# EAGLE board 8085_V1 (EAGLE 7.6.0)
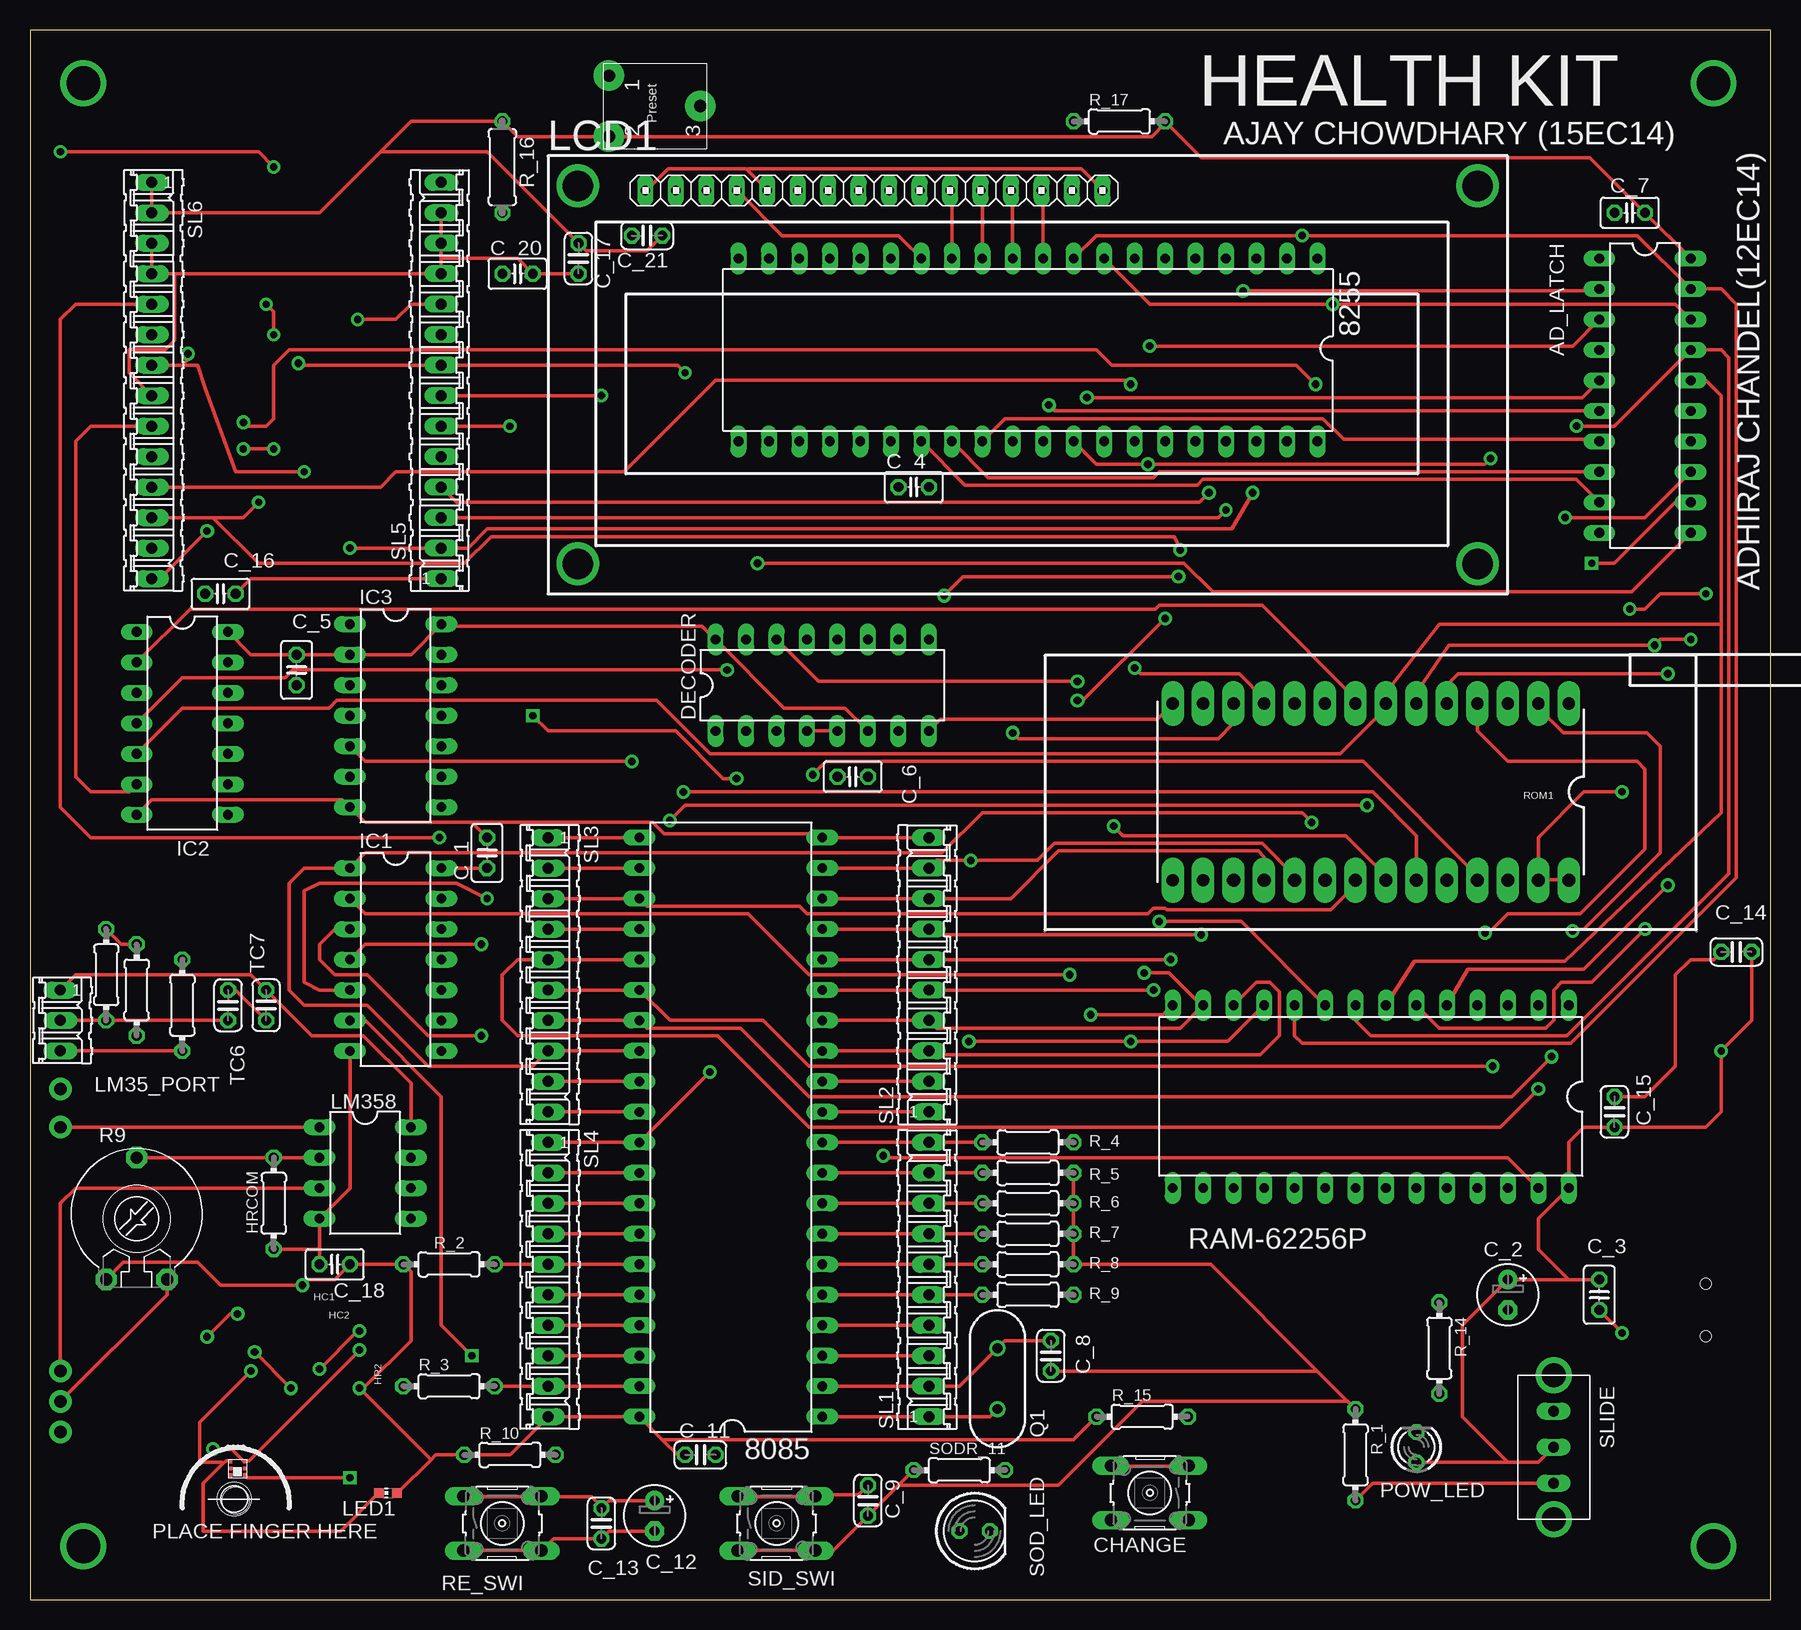
[diagram p0: board, top side]
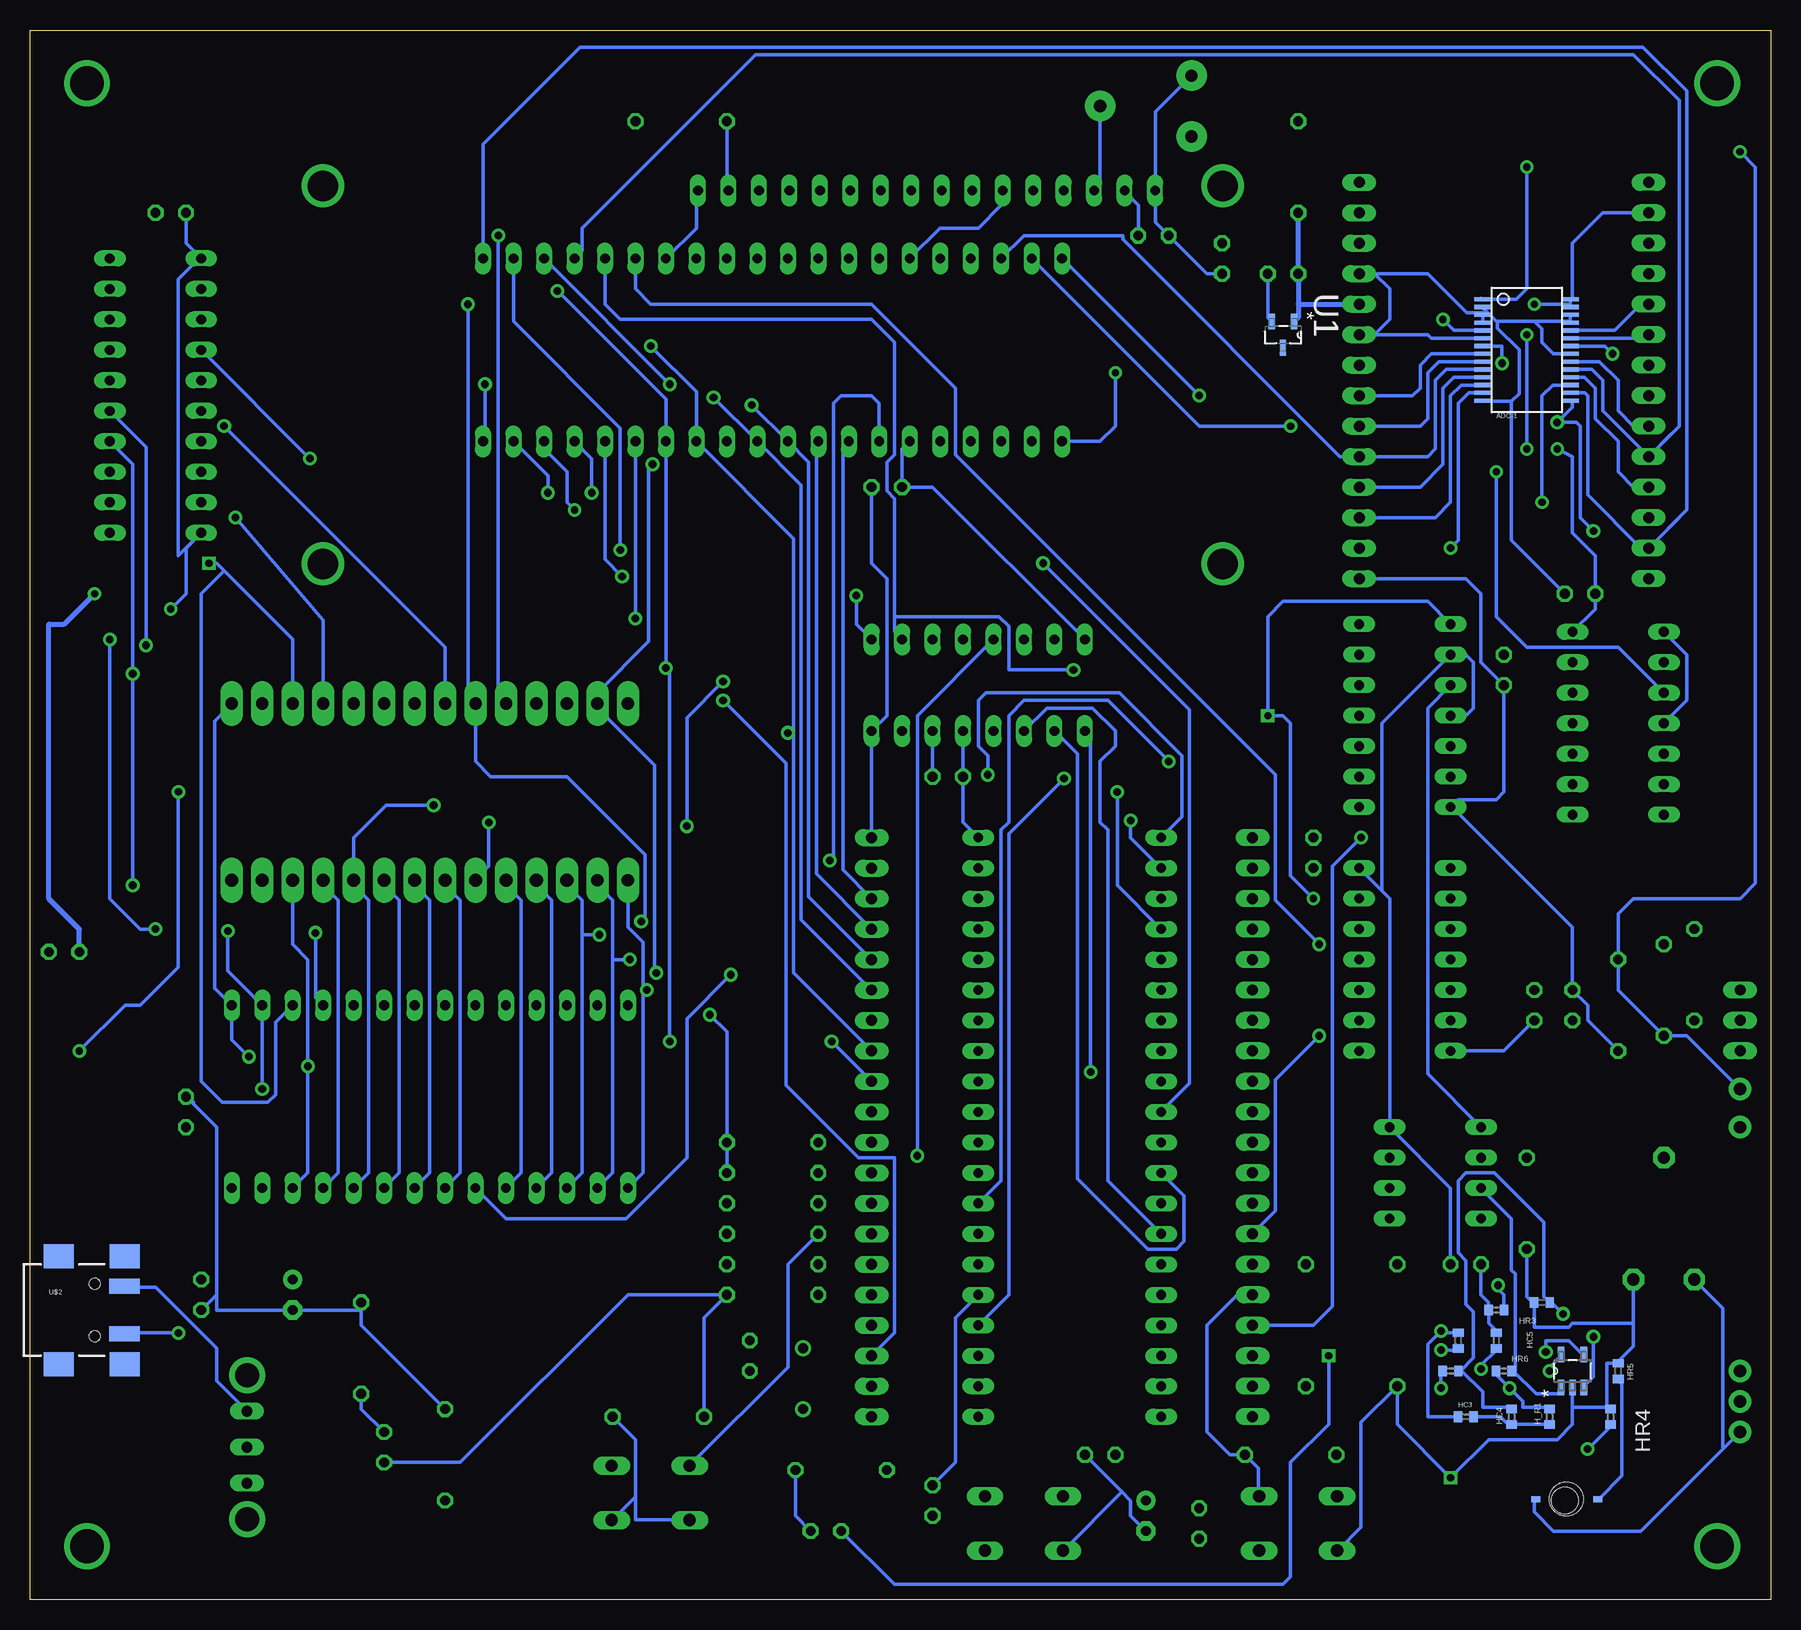
[diagram p1: board, bottom side, seen from below]

Size 145.09 x 130.8 mm. Coordinates in mm from the lower left corner, seen from the top.
Outline: 0,0 145.09,0 145.09,130.8 0,130.8 0,0
Copper layers (1*16): Top 0.035mm / dielectric 1.5mm / Bottom 0.035mm
Design rules "drcsetting *": minimum track width 12mil, minimum drill 25mil, track to track 12mil, track to pad 12mil, pad to pad 12mil, via to via 12mil, smd to smd 12mil, copper to edge 40mil, drill to drill 12mil, minimum pad ring 10mil, minimum via ring 10mil, stop-mask expansion 4mil, vias tented up to drill 0mil, thermal gap 10mil
Net classes: 0 default: width 0.305 mm, clearance 0.305 mm; 1 VCC: width 0.61 mm, clearance 0.305 mm to class 0, clearance 0.305 mm; 2 GND: width 0.61 mm, clearance 0.305 mm to class 0, clearance 0.305 mm to class 1, clearance 0.305 mm; 3 power: width 0.406 mm
Holes 2.2 mm at 17.14,8.26

## Footprints (pad centres in the part's own frame; a part is rotated, then mirrored left to right if it is on the bottom)
DIL40 = drill 0.813 long: 1 -24.13,-7.62; 2 -21.59,-7.62; 3 -19.05,-7.62; 4 -16.51,-7.62; 5 -13.97,-7.62; 6 -11.43,-7.62; 7 -8.89,-7.62; 8 -6.35,-7.62; 9 -3.81,-7.62; 10 -1.27,-7.62; 11 1.27,-7.62; 12 3.81,-7.62; 13 6.35,-7.62; 14 8.89,-7.62; 15 11.43,-7.62; 16 13.97,-7.62; 17 16.51,-7.62; 18 19.05,-7.62; 19 21.59,-7.62; 20 24.13,-7.62; 21 24.13,7.62; 22 21.59,7.62; 23 19.05,7.62; 24 16.51,7.62; 25 13.97,7.62; 26 11.43,7.62; 27 8.89,7.62; 28 6.35,7.62; 29 3.81,7.62; 30 1.27,7.62; 31 -1.27,7.62; 32 -3.81,7.62; 33 -6.35,7.62; 34 -8.89,7.62; 35 -11.43,7.62; 36 -13.97,7.62; 37 -16.51,7.62; 38 -19.05,7.62; 39 -21.59,7.62; 40 -24.13,7.62
DIL20 = drill 0.813 long: 1 -11.43,-3.81; 2 -8.89,-3.81; 3 -6.35,-3.81; 4 -3.81,-3.81; 5 -1.27,-3.81; 6 1.27,-3.81; 7 3.81,-3.81; 8 6.35,-3.81; 9 8.89,-3.81; 10 11.43,-3.81; 11 11.43,3.81; 12 8.89,3.81; 13 6.35,3.81; 14 3.81,3.81; 15 1.27,3.81; 16 -1.27,3.81; 17 -3.81,3.81; 18 -6.35,3.81; 19 -8.89,3.81; 20 -11.43,3.81
SSOP28 = smd 0.348 x 1.397: 1 -4.225,-3.656; 2 -3.575,-3.656; 3 -2.925,-3.656; 4 -2.275,-3.656; 5 -1.625,-3.656; 6 -0.975,-3.656; 7 -0.325,-3.656; 8 0.325,-3.656; 9 0.975,-3.656; 10 1.625,-3.656; 11 2.275,-3.656; 12 2.925,-3.656; 13 3.575,-3.656; 14 4.225,-3.656; 15 4.225,3.656; 16 3.575,3.656; 17 2.925,3.656; 18 2.275,3.656; 19 1.625,3.656; 20 0.975,3.656; 21 0.325,3.656; 22 -0.325,3.656; 23 -0.975,3.656; 24 -1.625,3.656; 25 -2.275,3.656; 26 -2.925,3.656; 27 -3.575,3.656; 28 -4.225,3.656
C025-025X050 = drill 0.813 octagon: 1 -1.27,0; 2 1.27,0
E2,5-5 = drill 0.813 pad 1.6: + -1.27,0 | drill 0.813 pad 1.6 octagon: - 1.27,0
C025-024X044 = drill 0.813 octagon: 1 -1.27,0; 2 1.27,0
B3F-10XX = drill 1.016 long: 1 -3.251,2.261; 2 3.251,2.261; 3 -3.251,-2.261; 4 3.251,-2.261
DIL16 = drill 0.813 long: 1 -8.89,-3.81; 2 -6.35,-3.81; 3 -3.81,-3.81; 4 -1.27,-3.81; 5 1.27,-3.81; 6 3.81,-3.81; 7 6.35,-3.81; 8 8.89,-3.81; 9 8.89,3.81; 10 6.35,3.81; 11 3.81,3.81; 12 1.27,3.81; 13 -1.27,3.81; 14 -3.81,3.81; 15 -6.35,3.81; 16 -8.89,3.81
KBREVMNTLED = smd 0.75 x 0.5 bottom: GND 5.144,0; V+ 0,0 | hole 2.794: 2.54,0
1X01NS = drill 1.016 pad 1.88: 1 0,0
R0402 = smd 0.7 x 0.9: 1 -0.65,0; 2 0.65,0
C0402 = smd 0.7 x 0.9: 1 -0.65,0; 2 0.65,0
0204/7 = drill 0.813 octagon: 1 -3.81,0; 2 3.81,0
DIL14 = drill 0.813 long: 1 -7.62,-3.81; 2 -5.08,-3.81; 3 -2.54,-3.81; 4 0,-3.81; 5 2.54,-3.81; 6 5.08,-3.81; 7 7.62,-3.81; 8 7.62,3.81; 9 5.08,3.81; 10 2.54,3.81; 11 0,3.81; 12 -2.54,3.81; 13 -5.08,3.81; 14 -7.62,3.81
16X2_LCD = drill 0.813 long: 1 8.12,33.608; 2 10.66,33.608; 3 13.2,33.608; 4 15.74,33.608; 5 18.28,33.608; 6 20.82,33.608; 7 23.36,33.608; 8 25.9,33.608; 9 28.44,33.608; 10 30.98,33.608; 11 33.52,33.608; 12 36.06,33.608; 13 38.6,33.608; 14 41.14,33.608; 15 43.68,33.608; 16 46.22,33.608 | drill 2.54: P$1 2.5,34; P$2 2.5,2.5; P$3 77.5,2.5; P$4 77.5,34
CHIP-LED0603 = smd 0.8 x 0.8: A 0,-0.75; C 0,0.75
03P = drill 0.914 long: 1 -2.54,0; 2 0,0; 3 2.54,0
DIL08 = drill 0.813 long: 1 -3.81,-3.81; 2 -1.27,-3.81; 3 1.27,-3.81; 4 3.81,-3.81; 5 3.81,3.81; 6 1.27,3.81; 7 -1.27,3.81; 8 -3.81,3.81
LED3MM = drill 0.813 octagon: A -1.27,0; K 1.27,0
HC49US = drill 0.813: 1 -2.54,0; 2 2.54,0
PT-10 = drill 1.016 pad 1.778 octagon: 1 -2.54,-5.08; 2 2.54,-5.08; 3 0,5.08
0207/7 = drill 0.813 octagon: 1 -3.81,0; 2 3.81,0
DIL28-6 = drill 0.813 long: 1 -16.51,-7.62; 2 -13.97,-7.62; 3 -11.43,-7.62; 4 -8.89,-7.62; 5 -6.35,-7.62; 6 -3.81,-7.62; 7 -1.27,-7.62; 8 1.27,-7.62; 9 3.81,-7.62; 10 6.35,-7.62; 11 8.89,-7.62; 12 11.43,-7.62; 13 13.97,-7.62; 14 16.51,-7.62; 15 16.51,7.62; 16 13.97,7.62; 17 11.43,7.62; 18 8.89,7.62; 19 6.35,7.62; 20 3.81,7.62; 21 1.27,7.62; 22 -1.27,7.62; 23 -3.81,7.62; 24 -6.35,7.62; 25 -8.89,7.62; 26 -11.43,7.62; 27 -13.97,7.62; 28 -16.51,7.62
DIL28-6-ZIF_SOCKET = drill 1.016 pad 1.88 long: 1 -24.13,-7.366; 2 -21.59,-7.366; 3 -19.05,-7.366; 4 -16.51,-7.366; 5 -13.97,-7.366; 6 -11.43,-7.366; 7 -8.89,-7.366; 8 -6.35,-7.366; 9 -3.81,-7.366; 10 -1.27,-7.366; 11 1.27,-7.366; 12 3.81,-7.366; 13 6.35,-7.366; 14 8.89,-7.366; 15 8.89,7.366; 16 6.35,7.366 | drill 1.1 pad 1.88 long: 17 3.81,7.366; 18 1.27,7.366; 19 -1.27,7.366; 20 -3.81,7.366; 21 -6.35,7.366; 22 -8.89,7.366; 23 -11.43,7.366; 24 -13.97,7.366; 25 -16.51,7.366; 26 -19.05,7.366; 27 -21.59,7.366; 28 -24.13,7.366
10P = drill 0.914 long: 1 -11.43,0; 2 -8.89,0; 3 -6.35,0; 4 -3.81,0; 5 -1.27,0; 6 1.27,0; 7 3.81,0; 8 6.35,0; 9 8.89,0; 10 11.43,0
14P = drill 0.914 long: 1 -16.51,0; 2 -13.97,0; 3 -11.43,0; 4 -8.89,0; 5 -6.35,0; 6 -3.81,0; 7 -1.27,0; 8 1.27,0; 9 3.81,0; 10 6.35,0; 11 8.89,0; 12 11.43,0; 13 13.97,0; 14 16.51,0
BIGSWITCH = drill 0.9 long: 1 -3,0; 2 0,0; 3 3,0 | drill 2 pad 2.184: TAB1 -6,0; TAB2 6,0
LED5MM = drill 0.813 octagon: A -1.27,0; K 1.27,0
SOT95P237X112-3N = smd 1.321 x 0.559: 1 -1.092,0.94; 2 -1.092,-0.94 | smd 1.321 x 0.508: 3 1.092,0
PRESET_LR = drill 1.016 pad 2.54: P$1 -2.54,-3.81; P$2 2.54,-3.81; P$3 0,3.81
USB(POWER) = smd 2.54 x 1.27: GND 2.5,-1.981; VBUS 2.5,1.981 | smd 2.5 x 2: GND@1 -3,-4.5; GND@2 -3,4.5; GND@3 2.5,4.5; GND@4 2.5,-4.5 | hole 0.9: 0,2.2; 0,-2.2
SOT95P270X145-5N = smd 1.321 x 0.559: 1 -1.372,0.94; 2 -1.372,0; 3 -1.372,-0.94; 4 1.372,-0.94; 5 1.372,0.94
APDS9008 = smd 0.35 x 0.35: GND 0.18,-1.42; NCC1 0.18,-0.18; OUT 1.36,-1.42; VCC 1.36,-0.18 | smd 0.3 x 0.35: NC 0.78,-1.42; NCC 0.78,-0.18

## Placement (x,y rotation side)
8085  [DIL40]  58.42,39.37 90 top
8255  [DIL40]  83.19,104.14 180 top
AD_LATCH  74HC573N  [DIL20]  134.62,100.33 270 top
ADC-1  ADS7842(12-ADC)  [SSOP28]  20.32,104.14 270 bottom
C_1  0.1uf  [C025-025X050]  38.1,62.23 90 top
C_2  10uf  [E2,5-5]  123.19,25.4 270 top
C_3  0.1uf  [C025-025X050]  130.81,25.4 270 top
C_4  0.1uf  [C025-025X050]  73.66,92.71 0 top
C_5  0.1uf  [C025-025X050]  22.23,77.47 270 top
C_6  0.1uf  [C025-025X050]  68.58,68.58 180 top
C_7  0.1uf  [C025-025X050]  133.35,115.57 180 top
C_8  22pf  [C025-024X044]  85.09,20.32 270 top
C_9  0.1uf  [C025-024X044]  69.85,8.26 270 top
C_11  [C025-024X044]  55.88,12.06 0 top
C_12  10uf  [E2,5-5]  52.07,6.99 270 top
C_13  0.1uf  [C025-024X044]  47.62,6.35 270 top
C_14  0.1uf  [C025-024X044]  142.24,53.98 180 top
C_15  0.1uf  [C025-024X044]  132.08,40.64 90 top
C_16  0.1uf  [C025-025X050]  15.88,83.82 0 top
C_17  [C025-024X044]  45.72,111.76 270 top
C_18  0.1uf  [C025-025X050]  25.4,27.94 180 top
C_20  [C025-025X050]  40.64,110.49 0 top
C_21  0.1uf  [C025-024X044]  51.44,113.67 180 top
CHANGE  [B3F-10XX]  93.34,8.89 180 top
DECODER  74HCT138N  [DIL16]  66.04,76.2 0 top
FINGERLED  KBREVMTNLED  [KBREVMNTLED]  19.56,8.38 180 top
GND  M01SMDNS  [1X01NS]  2.54,16.51 90 top
H_R1  10k  [R0402]  18.41,15.24 90 bottom
HC1  2.2uf  [C0402]  22.86,24.13 180 bottom
HC2  4.7uf  [C0402]  26.04,21.59 90 bottom
HC3  4.7uf  [C0402]  25.4,15.24 0 bottom
HC4  2.2uf  [C0402]  21.59,15.24 90 bottom
HC5  4.7uf  [C0402]  22.86,21.59 90 bottom
HEART_PULSE  M01SMDNS  [1X01NS]  2.54,19.05 90 top
HR2  100k  [R0402]  26.67,19.05 180 bottom
HR3  100k  [R0402]  19.05,24.77 0 bottom
HR4  12k  [R0402]  13.34,15.24 270 bottom
HR5  470  [R0402]  12.7,19.05 270 bottom
HR6  3.3m  [R0402]  22.23,19.05 0 bottom
HRCOM  [0204/7]  20.32,33.02 90 top
IC1  7404N  [DIL14]  30.48,53.34 270 top
IC2  7432N  [DIL14]  12.7,73.03 270 top
IC3  74HCT74N  [DIL14]  30.48,73.66 270 top
LCD1  [16X2_LCD]  43.18,83.82 0 top
LED1  [CHIP-LED0603]  29.84,8.89 90 top
LM35_PORT  [03P]  2.54,48.26 270 top
LM358  LM358N  [DIL08]  27.94,35.56 270 top
OUT1  M01SMDNS  [1X01NS]  2.54,13.97 90 top
POW_LED  LED3MM  [LED3MM]  115.57,12.7 90 top
PULSE  M01SMDNS  [1X01NS]  2.54,39.37 270 top
Q1  [HC49US]  80.64,18.41 270 top
R9  [PT-10]  8.89,31.75 0 top
R_1  1k  [0204/7]  110.49,12.06 270 top
R_2  10k  [0204/7]  34.92,27.94 0 top
R_3  10k  [0204/7]  34.92,17.78 0 top
R_4  10k  [0204/7]  83.19,38.1 180 top
R_5  10k  [0204/7]  83.19,35.56 180 top
R_6  10k  [0204/7]  83.19,33.02 180 top
R_7  10k  [0204/7]  83.19,30.48 180 top
R_8  10k  [0204/7]  83.19,27.94 180 top
R_9  10k  [0204/7]  83.19,25.4 180 top
R_10  10k  [0204/7]  40.01,12.06 0 top
R_14  [0204/7]  117.47,20.95 270 top
R_15  10k  [0204/7]  92.71,15.24 0 top
R_16  [0207/7]  39.37,119.38 270 top
R_17  1k  [0204/7]  90.81,123.19 0 top
R_18  10k  [0204/7]  12.7,49.53 270 top
R_19  68k  [0204/7]  8.89,50.8 270 top
R_20  22k  [0204/7]  6.35,52.07 90 top
RAM-62256P  [DIL28-6]  111.76,41.91 180 top
RE_SWI  [B3F-10XX]  39.37,6.35 0 top
ROM1  EEPROM_ZIF  [DIL28-6-ZIF_SOCKET]  104.14,67.31 180 top
SID_SWI  [B3F-10XX]  62.23,6.35 0 top
SL1  [10P]  74.93,26.67 90 top
SL2  [10P]  74.93,52.07 90 top
SL3  [10P]  43.18,52.07 270 top
SL4  [10P]  43.18,26.67 270 top
SL5  [14P]  34.29,101.6 90 top
SL6  [14P]  10.16,101.6 270 top
SLIDE  SLIDESWITCH-BIG  [BIGSWITCH]  127,12.7 270 top
SOD_LED  LED5MM  [LED5MM]  78.74,5.71 0 top
SODR_11  330  [0204/7]  77.47,10.79 0 top
TC6  100nF  [C025-024X044]  16.51,49.53 270 top
TC7  100nF  [C025-024X044]  19.68,49.53 90 top
TEMP_SENSOR  M01SMDNS  [1X01NS]  2.54,42.55 0 top
U1  LM4040A41IDBZT  [SOT95P237X112-3N]  40.64,105.41 270 bottom
U$1  PRESET_LR  [PRESET_LR]  52.07,124.46 270 top
U$2  USB(POWER)  [USB(POWER)]  139.7,24.13 0 bottom
U$3  MCP6001UT-E/OT  [SOT95P270X145-5N]  16.51,19.05 90 bottom
U$4  APDS9008  [APDS9008]  16.51,10.16 90 top

## Library data of the parts
8085 8255 = micro-intel; OC_FARNELL: unknown; OC_NEWARK: unknown
AD_LATCH DECODER IC1-IC3 = 74xx-eu
ADC-1 = ADS7842(12Bit_ADC)
C_1 C_2 C_12 = MSP PROJECT LIBRARY
C_3-C_7 C_16 C_18 H_R1 HC1-HC5 HR2-HR6 = resistor
C_8 C_9 C_11 C_13-C_15 C_17 C_20 C_21 HRCOM R9 R_1-R_10 R_14 R_15 R_17-R_20 SODR_11 TC6 TC7 = rcl
CHANGE RE_SWI SID_SWI = switch-omron; MPN: B3F-1000; OC_FARNELL: 176432; OC_NEWARK: 36M3542
FINGERLED U$4 = untitled
GND HEART_PULSE OUT1 PULSE TEMP_SENSOR = SparkFun
LCD1 LM358 Q1 SOD_LED U$1 U$2 = CEDT_JANUARY_2015_v5
LED1 = led
LM35_PORT SL1-SL6 = con-amp-quick; OC_FARNELL: unknown; OC_NEWARK: unknown
POW_LED = CEDTv81
R_16 = CEDT_JANUARY_2015_v6 (2)
RAM-62256P = memory-hitachi; OC_FARNELL: unknown; OC_NEWARK: unknown
ROM1 = eepromzif
SLIDE = CEDT_JANUARY_2015_v5_a
U1 = Texas Instruments_By_element14_Batch_1; MPN: LM4040A41IDBZT; OC_FARNELL: 1755107; OC_NEWARK: 66K2443; PACKAGE: 3-SOT-23; SUPPLIER: TEXAS INSTRUMENTS
U$3 = untitled; MPN: MCP6001UT-E/OT; OC_FARNELL: 1840893; OC_NEWARK: 84R5183; PACKAGE: SOT23-5; SUPPLIER: Microchip

## Nets
A0: 8255.9 AD_LATCH.19 RAM-62256P.10 ROM1.10
A1: 8255.8 AD_LATCH.18 RAM-62256P.9 ROM1.9
A2: AD_LATCH.17 IC2.2 RAM-62256P.8 ROM1.8
A3: AD_LATCH.16 IC2.5 RAM-62256P.7 ROM1.7
A4: AD_LATCH.15 RAM-62256P.6 ROM1.6
A5: AD_LATCH.14 RAM-62256P.5 ROM1.5
A6: AD_LATCH.13 RAM-62256P.4 ROM1.4
A7: AD_LATCH.12 RAM-62256P.3 ROM1.3
A8: 8085.21 RAM-62256P.25 ROM1.25 SL3.1
A9: 8085.22 RAM-62256P.24 ROM1.24 SL3.2
A10: 8085.23 RAM-62256P.21 ROM1.21 SL3.3
A11: 8085.24 RAM-62256P.23 ROM1.23 SL3.4
A12: 8085.25 RAM-62256P.2 ROM1.2 SL3.5
A13: 8085.26 RAM-62256P.26 ROM1.26 SL3.6
A14: 8085.27 RAM-62256P.1 ROM1.1 SL3.7
A15: 8085.28 IC1.1 ROM1.20 SL3.8
A15*: IC1.2 RAM-62256P.20
AD0: 8085.12 8255.34 AD_LATCH.2 RAM-62256P.11 ROM1.11 SL2.2
AD1: 8085.13 8255.33 AD_LATCH.3 RAM-62256P.12 ROM1.12 SL2.3
AD2: 8085.14 8255.32 AD_LATCH.4 RAM-62256P.13 ROM1.13 SL2.4
AD3: 8085.15 8255.31 AD_LATCH.5 RAM-62256P.15 ROM1.15 SL2.5
AD4: 8085.16 8255.30 AD_LATCH.6 RAM-62256P.16 ROM1.16 SL2.6
AD5: 8085.17 8255.29 AD_LATCH.7 RAM-62256P.17 ROM1.17 SL2.7
AD6: 8085.18 8255.28 AD_LATCH.8 RAM-62256P.18 ROM1.18 SL2.8
AD7: 8085.19 8255.27 AD_LATCH.9 RAM-62256P.19 ROM1.19 SL2.9
ADC0: 8255.4 ADC-1.19 SL6.10
ADC1: 8255.3 ADC-1.18 SL6.11
ADC2: 8255.2 ADC-1.17 SL6.12
ADC3: 8255.1 ADC-1.16 SL6.13
ADC4: 8255.40 ADC-1.15 SL6.14
ADC5: 8255.39 ADC-1.13 SL5.2
ADC6: 8255.38 ADC-1.12 SL5.3
ADC7: 8255.37 ADC-1.11 SL5.4
ADC8: 8255.18 ADC-1.10 SL5.5
ADC9: 8255.19 ADC-1.9 SL5.6
ADC10: 8255.20 ADC-1.8 SL5.7
ADC11: 8255.21 ADC-1.7 SL5.8
ADC_RD*: ADC-1.20 IC2.6 SL6.9
ADC_WR*: ADC-1.22 IC2.3 SL6.7
AIN0: SL5.14
ALE: 8085.30 AD_LATCH.11 SL3.10
BUSY*: ADC-1.23 SL6.6
CLK_OUT: 8085.37 ADC-1.24 SL4.7 SL6.5
CS: 8255.6 IC1.4
D4: 8255.13 LCD1.11
D5: 8255.12 LCD1.12
D6: 8255.11 LCD1.13
D7: 8255.10 LCD1.14
EN: 8255.15 LCD1.6
GND: 8085.20 8255.7 AD_LATCH.1 AD_LATCH.10 ADC-1.2 ADC-1.3 ADC-1.4 ADC-1.6 ADC-1.14 ADC-1.21 ADC-1.25 ADC-1.26 C_1.2 C_2.- C_3.2 C_4.2 C_5.2 C_6.2 C_7.2 C_8.2 C_9.2 C_11.2 C_12.- C_13.2 C_14.2 C_15.2 C_16.2 C_17.2 C_18.2 C_20.2 C_21.2 DECODER.4 DECODER.5 DECODER.8 GND.1 HC1.2 HC5.2 HR3.1 HR4.1 HR5.1 HRCOM.1 IC1.7 IC2.7 IC3.7 LCD1.1 LCD1.5 LCD1.16 LM35_PORT.3 LM358.4 R9.2 R_1.1 R_3.1 R_4.1 R_5.1 R_6.1 R_7.1 R_8.1 R_14.1 R_18.2 RAM-62256P.14 RE_SWI.3 RE_SWI.4 ROM1.14 SID_SWI.3 SID_SWI.4 SL2.10 SL5.1 SL5.9 SL5.11 SL5.12 SL5.13 SL6.3 SL6.4 SL6.8 SODR_11.1 TC6.1 TC7.1 U1.2 U$1.P$1 U$2.GND U$3.2 U$4.GND
HLDA: 8085.38 SL4.8
HOLD: 8085.39 R_3.2 SL4.9
INTA: 8085.11 SL2.1
INTR: 8085.10 R_4.2 SL1.10
IO/M*: 8085.34 DECODER.3 IC1.3 SL4.4
IOR*: 8255.5 DECODER.10 IC2.1 IC2.4
IOW*: 8255.36 DECODER.9
MEMR*: DECODER.14 RAM-62256P.22 ROM1.22
MEMW*: DECODER.13 RAM-62256P.27
N$1: SOD_LED.K SODR_11.2
N$2: POW_LED.K R_14.2
N$3: IC1.6 SOD_LED.A
N$4: LED1.C U$3.5 U$4.VCC
N$5: HC2.2 HC3.1 HC5.1
N$6: 8255.16
N$7: 8255.17
N$8: H_R1.1 HC3.2 HC4.1
N$9: HC4.2 HR2.1 HR3.2 U$3.3
N$10: H_R1.2 HR6.1 U$3.4
N$11: HC2.1 HR4.2 U$4.OUT
N$12: FINGERLED.GND HR5.2
N$13: ADC-1.1 R_18.1 R_19.2 TEMP_SENSOR.1
N$14: LM35_PORT.2 R_20.1 TC6.2
N$16: LCD1.3 U$1.P$3
N$17: R_19.1 R_20.2
N$19: HRCOM.2 LM358.2 R9.3
N$20: IC3.3 LM358.1 PULSE.1
N$29: LCD1.15 R_17.1
N$31: SLIDE.1 U$2.VBUS
N$32: R_1.2 SLIDE.3
OUT: HEART_PULSE.1 HR6.2 LM358.3 U$3.1
RD*: 8085.32 DECODER.2 SL4.2
READY: 8085.35 R_2.2 SL4.5
RES_IN: 8085.36 C_12.+ C_13.1 R_10.2 RE_SWI.1 RE_SWI.2 SL4.6
RES_OUT: 8085.3 8255.35 SL1.3
RS: 8255.14 LCD1.4
RST5_5: 8085.9 R_5.2 SL1.9
RST6.5: 8085.8 IC3.5 R_6.2 SL1.8
RST7.5: 8085.7 CHANGE.3 CHANGE.4 R_7.2 SL1.7
S0: 8085.29 SL3.9
S1: 8085.33 SL4.3
SID: 8085.5 C_9.1 R_9.2 SID_SWI.1 SID_SWI.2 SL1.5
SID1: CHANGE.1 CHANGE.2 R_15.2
SOD: 8085.4 IC1.5 IC3.1 SL1.4
TRAP: 8085.6 R_8.2 SL1.6
VCC: 8085.40 8255.26 AD_LATCH.20 ADC-1.27 ADC-1.28 C_1.1 C_2.+ C_3.1 C_4.1 C_5.1 C_6.1 C_7.1 C_11.1 C_14.1 C_15.1 C_16.1 C_17.1 C_18.1 C_21.1 DECODER.6 DECODER.16 FINGERLED.V+ HC1.1 HR2.2 IC1.14 IC2.14 IC3.2 IC3.4 IC3.14 LCD1.2 LED1.A LM35_PORT.1 LM358.8 OUT1.1 POW_LED.A R9.1 R_2.1 R_9.1 R_10.1 R_15.1 R_16.1 R_17.2 RAM-62256P.28 ROM1.27 ROM1.28 SL4.10 SL6.1 SL6.2 SLIDE.2 TC7.2 U$1.P$2
VREF [power]: ADC-1.5 C_20.1 R_16.2 SL5.10 U1.1
WR*: 8085.31 DECODER.1 SL4.1
X1: 8085.1 Q1.2 SL1.1
X2: 8085.2 C_8.1 Q1.1 SL1.2

## Tracks (layer width: path | path; a pad name or v marks a point on that pad's centre or on a via)
A0  (via drill 0.64)
  Top 0.305: 8255.9 88.9,113.67 v106.05,113.67 133.99,113.67 AD_LATCH.19 140.97,109.22 142.24,107.95 142.24,60.17 128.43,46.35 106.05,46.35 105.41,46.99 RAM-62256P.10
  Bottom 0.305: v106.05,113.67 106.05,75.41 105.41,74.77 ROM1.10
A1  (via drill 0.64)
  Top 0.305: RAM-62256P.9 100.97,56.52 v94.14,56.52 | 8255.8 93.34,107.95 v108.58,107.95 137.16,107.95 AD_LATCH.18
  Bottom 0.305: v94.14,56.52 93.82,56.83 93.82,62.07 100.33,68.58 106.68,68.58 107.95,69.85 ROM1.9 107.95,74.77 108.58,75.41 v108.58,107.95
A2  (via drill 0.64)
  Top 0.305: IC2.2 13.34,82.55 93.82,82.55 94.14,82.87 102.71,82.87 110.49,75.09 ROM1.8 | v128.91,97.79 132.08,97.79 AD_LATCH.17 140.97,104.14 141.6,103.5 141.6,60.48 128.11,46.99 111.76,46.99 110.49,48.26 RAM-62256P.8
  Bottom 0.305: v128.91,97.79 110.49,79.38 ROM1.8
A3
  Top 0.305: RAM-62256P.7 115.41,53.18 127.95,53.18 140.97,65.56 140.97,81.28 | IC2.5 12.7,74.3 24.92,74.3 25.56,74.93 52.23,74.93 56.67,70.48 109.22,70.48 113.03,74.3 ROM1.7 113.03,75.56 117.47,81.28 140.97,81.28 | AD_LATCH.16 139.7,101.6 140.97,100.33 140.97,81.28
A4  (via drill 0.6, 0.64)
  Top 0.305: ROM1.6 115.57,75.56 118.27,79.53 v135.41,79.53 135.89,80.01 v138.43,80.01 | RAM-62256P.6 117.47,47.62 126.36,47.62 127,48.26 127,50.8 127.64,51.44 130.18,51.44 v134.62,55.88
  Bottom 0.305: AD_LATCH.15 135.41,96.04 v135.41,79.53 | v134.62,55.88 135.89,55.88 138.43,58.42 v138.43,80.01
A5  (via drill 0.64)
  Top 0.305: RAM-62256P.5 119.86,52.55 129.54,52.55 v136.53,59.53 | v136.53,77.15 119.06,77.15 118.11,76.2 ROM1.5
  Bottom 0.305: v136.53,59.53 v136.53,77.15 136.53,94.61 AD_LATCH.14
A6  (via drill 0.64)
  Top 0.305: 120.65,74.3 ROM1.4 120.65,72.39 123.19,69.85 133.99,69.85 134.62,69.22 134.62,62.55 129.22,57.15 123.19,57.15 121.6,55.56 v121.28,55.56 | AD_LATCH.13 134.62,90.17 v127.95,90.17
  Bottom 0.305: RAM-62256P.4 121.28,50.16 v121.28,55.56 | v127.95,90.17 120.65,81.6 ROM1.4
A7  (via drill 0.6)
  Top 0.305: AD_LATCH.12 137.16,91.44 132.08,86.36 v130.18,86.36
  Bottom 0.305: RAM-62256P.3 124.62,48.1 124.62,42.07 125.25,41.43 129.06,41.43 130.81,43.18 130.81,83.82 128.91,85.72 | 128.91,85.72 129.54,86.36 v130.18,86.36 130.33,86.2 | 128.91,85.72 123.19,80.01 ROM1.3
A8  (via drill 0.64)
  Top 0.305: SL3.1 8085.21 | ROM1.25 120.65,60.33 111.12,69.85 66.36,69.85 v65.25,68.74
  Bottom 0.305: RAM-62256P.25 119.38,35.56 119.38,58.26 120.65,59.53 ROM1.25 | 8085.21 49.05,65.25 49.05,70.33 54.29,75.56 65.41,75.56 66.04,74.93 66.04,71.12 65.25,70.33 v65.25,68.74
A9  (via drill 0.64)
  Top 0.305: SL3.2 8085.22 | v53.34,64.93 54.61,66.2 v111.44,66.2
  Bottom 0.305: RAM-62256P.24 116.84,35.56 116.84,58.26 118.11,59.53 ROM1.24 118.11,63.5 115.41,66.2 v111.44,66.2 | 8085.22 53.34,63.5 v53.34,64.93
A10
  Top 0.305: SL3.3 8085.23 51.44,57.78 64.14,57.78 64.77,57.15 93.19,57.15 93.66,57.63 94.61,57.63 94.77,57.47 108.43,57.47 110.49,59.53 ROM1.21
  Bottom 0.305: RAM-62256P.21 109.22,35.56 109.22,58.26 110.49,59.53 ROM1.21
A11  (via drill 0.64)
  Top 0.305: SL3.4 8085.24 | v54.45,67.31 111.92,67.31 115.57,63.66 ROM1.23
  Bottom 0.305: RAM-62256P.23 114.3,35.56 114.3,58.26 115.57,59.53 ROM1.23 | 8085.24 54.45,59.53 v54.45,67.31
A12  (via drill 0.64)
  Top 0.305: 8085.25 SL3.5 40.64,53.34 39.37,52.07 39.37,48.26 40.64,46.99 57.31,46.99 64.93,39.37 122.56,39.37 v125.73,42.55 | ROM1.2 125.73,74.3 127.79,72.23 134.78,72.23 135.89,71.12 135.89,62.23 129.54,55.88 128.75,55.88 v128.59,55.72
  Bottom 0.305: v128.59,55.72 128.59,52.39 RAM-62256P.2 v125.73,42.55
A13  (via drill 0.64)
  Top 0.305: SL3.6 8085.26 53.34,48.26 61.12,48.26 64.93,44.45 v121.92,44.45
  Bottom 0.305: RAM-62256P.26 121.92,35.56 v121.92,44.45 121.92,53.34 123.19,54.61 ROM1.26
A14  (via drill 0.64)
  Top 0.305: SL3.7 8085.27 51.44,47.62 59.21,47.62 64.93,41.91 123.51,41.91 v126.84,45.24
  Bottom 0.305: ROM1.1 128.27,74.61 129.7,73.18 129.7,50.96 RAM-62256P.1 128.27,46.67 v126.84,45.24
A15  (via drill 0.64)
  Top 0.305: 8085.28 SL3.8 41.91,44.45 33.18,44.45 28.1,49.53 22.86,49.53 21.59,50.8 21.59,59.69 22.86,60.96 IC1.1 27.94,62.23 76.04,62.23 79.38,65.56 106.05,65.56 v106.84,64.77
  Bottom 0.305: v106.84,64.77 106.84,61.12 107.95,60.01 ROM1.20
A15*  (via drill 0.64)
  Top 0.305: IC1.2 27.94,57.15 59.85,57.15 64.93,52.07 v86.68,52.07
  Bottom 0.305: v86.68,52.07 90.33,48.42 90.33,36.83 95.41,31.75 105.41,31.75 RAM-62256P.20
AD0  (via drill 0.64)
  Top 0.305: SL2.2 8085.12 | RAM-62256P.11 99.85,46.51 v91.76,46.51 v78.26,46.51 | v92.08,77.63 92.55,77.15 100.81,77.15 102.87,75.09 ROM1.11 | AD_LATCH.2 130.65,109.06 v101.12,109.06
  Bottom 0.305: SL2.2 v78.26,46.51 | v101.12,109.06 92.08,100.01 8255.34 v92.08,77.63 91.76,77.31 v91.76,46.51
AD1  (via drill 0.64)
  Top 0.305: 8085.13 SL2.3 75.25,45.4 102.55,45.4 104.14,46.99 104.14,50.64 103.35,51.44 102.23,51.44 RAM-62256P.12 | AD_LATCH.3 128.59,104.46 v93.34,104.46 | ROM1.12 100.33,73.03 99.06,71.75 82.39,71.75 v81.92,72.23
  Bottom 0.305: 81.44,72.23 81.44,52.23 SL2.3 | 81.44,72.23 81.44,88.42 8255.33 89.53,100.65 v93.34,104.46 | 81.44,72.23 v81.92,72.23
AD2  (via drill 0.64)
  Top 0.305: 8085.14 SL2.4 75.56,47.62 95.89,47.62 RAM-62256P.13 97.63,49.53 94.93,52.23 v92.87,52.23 | 8255.32 88.9,94.61 v93.19,94.61 121.28,94.61 v121.76,95.09
  Bottom 0.305: v93.19,94.61 93.5,94.3 93.5,79.85 97.79,75.56 ROM1.13 97.79,74.3 93.03,69.53 93.03,52.39 v92.87,52.23 | v121.76,95.09 AD_LATCH.4
AD3  (via drill 0.64)
  Top 0.305: 8085.15 SL2.5 v93.66,50.8 | AD_LATCH.5 129.38,100.17 v88.11,100.17
  Bottom 0.305: RAM-62256P.15 93.98,35.56 93.98,50.8 | 93.98,50.8 93.98,54.77 95.25,56.04 ROM1.15 | SL2.5 80.8,56.67 80.8,92.87 8255.31 v88.11,100.17 | v93.66,50.8 93.98,50.8
AD4  (via drill 0.64)
  Top 0.305: 8085.16 SL2.6 v95.09,53.34 | AD_LATCH.6 85.41,99.06 v84.93,99.54
  Bottom 0.305: RAM-62256P.16 96.52,35.56 96.52,53.34 | 96.52,53.34 96.52,58.26 97.79,59.53 ROM1.16 | SL2.6 80.17,58.58 80.17,94.77 8255.30 v84.93,99.54 | v95.09,53.34 96.52,53.34
AD5  (via drill 0.64)
  Top 0.305: 8085.17 SL2.7 75.41,55.4 v97.63,55.4 | AD_LATCH.7 130.65,96.68 109.54,96.68 107.79,98.42 81.28,98.42 8255.29
  Bottom 0.305: RAM-62256P.17 99.06,35.56 99.06,55.4 | 99.06,55.4 99.06,58.26 100.33,59.53 ROM1.17 | 8255.29 79.53,96.36 79.53,60.48 SL2.7 | v97.63,55.4 99.06,55.4
AD6
  Top 0.305: 8085.18 SL2.8 81.76,58.42 85.72,62.39 102.39,62.39 102.87,61.91 ROM1.18 | AD_LATCH.8 94.14,93.98 93.66,93.5 79.85,93.5 8255.28
  Bottom 0.305: RAM-62256P.18 101.6,35.56 101.6,58.26 102.87,59.53 ROM1.18 | 8255.28 77.31,96.04 77.31,60.8 SL2.8
AD7  (via drill 0.64)
  Top 0.305: 8255.27 77.95,92.87 97.31,92.87 97.79,93.34 128.91,93.34 AD_LATCH.9 | 8085.19 SL2.9 75.56,61.59 v78.42,61.59 83.98,61.59 85.41,63.02 102.71,63.02 105.41,60.33 ROM1.19
  Bottom 0.305: RAM-62256P.19 104.14,35.56 104.14,58.26 105.41,59.53 ROM1.19 | 8255.27 74.3,99.69 74.93,100.33 77.47,100.33 78.11,99.69 78.11,61.91 v78.42,61.59
ADC0
  Bottom 0.305: SL6.10 8.26,97.16 | ADC-1.19 14.88,102.52 13.97,101.6 13.97,99.06 SL6.10 | 8255.4 99.06,112.39 99.06,114.3 84.61,128.75 11.43,128.75 7.62,124.94 7.62,97.79 SL6.10
ADC1  (via drill 0.64)
  Top 0.305: SL6.11 29.21,92.71 30.48,93.98 49.53,93.98 57.15,101.6 91.44,101.6 v91.76,101.28
  Bottom 0.305: v91.76,101.28 8255.3 | ADC-1.18 15.51,101.86 14.61,100.97 14.61,98.42 12.7,96.52 12.7,93.98 11.43,92.71 SL6.11
ADC2  (via drill 0.6, 0.64)
  Top 0.305: 95.73,87.95 v95.89,87.47 95.41,88.58 38.42,88.58 36.2,86.36 19.05,86.36 15.24,90.17 | SL6.12 15.24,90.17 | 15.24,90.17 17.78,90.17 v19.05,91.44
  Bottom 0.305: v95.89,87.47 95.89,97.63 104.78,106.52 8255.2 | ADC-1.17 18.16,101.22 19.05,100.33 v19.05,91.44
ADC3
  Bottom 0.305: 107.16,111.92 8255.1 107.31,121.28 99.22,129.38 10.64,129.38 6.99,125.73 6.99,90.81 SL6.13 | 7.62,90.17 SL6.13 | ADC-1.16 15.47,100.56 15.24,100.33 15.24,92.08 10.79,87.63 SL6.13
ADC4  (via drill 0.64)
  Top 0.305: v14.76,89.06 10.79,85.09 SL6.14 | v107.16,101.28 105.57,102.87 90.17,102.87 88.9,104.14 21.59,104.14 20.32,102.87 20.32,98.42 19.68,97.79 18.1,97.79 v17.78,98.11
  Bottom 0.305: ADC-1.15 16.51,99.85 16.51,99.38 v17.78,98.11 16.19,98.11 15.88,97.79 15.88,90.17 v14.76,89.06 | 8255.40 107.16,96.68 v107.16,101.28
ADC5  (via drill 0.6, 0.64)
  Top 0.305: v101.92,92.23 100.17,89.22 38.1,89.22 36.51,87.63 SL5.2 v26.67,87.63
  Bottom 0.305: 8255.39 101.92,93.66 v101.92,92.23 | ADC-1.13 25.16,100.56 26.04,99.69 26.04,88.27 v26.67,87.63
ADC6  (via drill 0.6)
  Top 0.305: v99.69,90.81 99.06,90.17 SL5.3
  Bottom 0.305: ADC-1.12 25.79,101.22 26.67,100.33 26.67,91.44 27.94,90.17 SL5.3 | 8255.38 102.23,95.89 100.33,93.98 100.33,91.44 v99.69,90.81
ADC7  (via drill 0.64)
  Top 0.305: v98.27,92.23 97.47,91.44 35.56,91.44 SL5.4
  Bottom 0.305: 8255.37 98.27,95.09 v98.27,92.23 | ADC-1.11 26.41,101.86 27.3,100.97 27.3,94.61 29.21,92.71 SL5.4
ADC8
  Bottom 0.305: 8255.18 62.23,113.67 53.98,113.67 53.98,113.35 35.88,95.25 SL5.5 28.57,95.25 27.94,95.89 27.94,101.6 27.02,102.52 ADC-1.10
ADC9  (via drill 0.6)
  Top 0.305: v40.01,97.79 SL5.6
  Bottom 0.305: 8255.19 47.62,97.79 v40.01,97.79 | ADC-1.9 27.64,103.17 28.57,102.23 28.57,98.42 29.21,97.79 SL5.6
ADC10  (via drill 0.64)
  Top 0.305: SL5.7 v47.62,100.33
  Bottom 0.305: v47.62,100.33 8255.20 | ADC-1.8 28.27,103.81 29.21,102.87 29.21,100.97 29.84,100.33 SL5.7
ADC11  (via drill 0.6, 0.64)
  Top 0.305: v22.38,103.03 22.54,102.87 SL5.8 53.98,102.87 v54.61,102.23
  Bottom 0.305: v22.38,103.03 22.38,104.46 23.97,104.46 ADC-1.7 | 8255.21 55.88,96.52 54.61,97.79 v54.61,102.23
ADC_RD*
  Top 0.305: SL6.9 5.08,97.79 3.81,96.52 3.81,68.58 5.08,67.31 8.26,67.31 IC2.6
  Bottom 0.305: ADC-1.20 14.27,103.17 12.7,101.6 12.7,99.06 11.43,97.79 SL6.9
ADC_WR*  (via drill 0.6, 0.64)
  Top 0.305: SL6.7 12.7,102.87 | 12.7,102.87 13.97,102.87 14.61,100.97 17.14,93.98 v22.86,93.98 | v13.18,103.82 13.18,103.35 12.7,102.87
  Bottom 0.305: ADC-1.22 16.67,104.46 13.81,104.46 v13.18,103.82 | IC2.3 12.7,79.38 20.32,79.38 22.86,81.92 v22.86,93.98
ALE  (via drill 0.64)
  Top 0.305: SL3.10 8085.30 | AD_LATCH.11 133.51,83.98 98.58,83.98 96.2,86.36 v60.64,86.36
  Bottom 0.305: v60.64,86.36 48.42,74.14 48.42,43.02 8085.30
BUSY*
  Bottom 0.305: ADC-1.23 10.46,105.11 SL6.6
CLK_OUT  (via drill 0.64)
  Top 0.305: SL4.7 8085.37 | v34.13,63.5 5.08,63.5 2.54,66.04 2.54,106.68 3.81,107.95 SL6.5
  Bottom 0.305: v34.13,63.5 36.51,61.12 36.51,24.45 38.1,22.86 SL4.7 | ADC-1.24 12.98,105.77 10.79,107.95 SL6.5
CS  (via drill 0.64)
  Top 0.305: IC1.4 27.94,54.61 v37.62,54.61
  Bottom 0.305: v37.62,54.61 41.27,58.26 41.27,68.74 67.94,95.41 67.94,100.97 74.93,107.95 93.34,107.95 94.61,109.22 8255.6
D4
  Top 0.305: 8255.13 76.83,117.32 LCD1.11
D5
  Top 0.305: 8255.12 79.38,117.32 LCD1.12
D6
  Top 0.305: 8255.11 81.92,117.32 LCD1.13
D7
  Top 0.305: 8255.10 84.45,117.32 LCD1.14
EN
  Bottom 0.305: LCD1.6 64.14,117.32 64.14,116.2 66.04,114.3 69.22,114.3 8255.15
GND  (via drill 0.6, 0.64)
  Top 0.305: R_5.1 R_6.1 R_7.1 R_8.1 98.42,27.94 107.31,19.05 | RAM-62256P.14 94.46,48.74 v88.42,48.74 | C_3.2 v132.72,22.23 | C_16.2 18.41,85.09 SL5.1 | SL6.8 8.26,102.23 8.26,104.14 11.27,104.14 12.06,104.93 12.06,110.49 | 12.06,110.49 SL6.4 SL6.3 | SL5.13 SL5.12 34.29,111.76 | 34.29,111.76 SL5.11 12.06,110.49 | C_17.2 C_20.2 40.64,111.76 34.29,111.76 | 59.77,119.14 59.69,119.22 53.18,119.22 51.44,117.47 LCD1.1 | 59.77,119.14 61.44,117.47 LCD1.5 | LCD1.16 89.38,117.47 87.63,119.22 59.85,119.22 59.77,119.14 | DECODER.5 DECODER.4 | DECODER.8 75.88,73.34 93.98,73.34 95.25,74.61 ROM1.14 | SL2.10 8085.20 65.72,63.82 52.86,63.82 51.91,64.77 36.99,64.77 36.91,64.69 | SODR_11.1 72.47,9.6 | 72.47,9.6 C_9.2 66.99,4.13 65.56,4.13 SID_SWI.4 65.41,4.13 59.05,4.13 SID_SWI.3 | C_12.- 48.26,5.71 C_13.2 43.66,5.08 42.7,4.13 RE_SWI.4 42.55,4.13 36.2,4.13 RE_SWI.3 | 36.91,64.69 36.83,64.77 27.94,64.77 IC3.7 26.04,66.67 10.16,66.67 IC2.7 | 36.91,64.69 C_1.2 | GND.1 11.43,25.4 R9.2 | C_18.2 24.13,29.21 | 24.13,29.21 LM358.4 26.67,34.29 IC1.7 | 24.13,29.21 HRCOM.1 | TC7.1 17.14,50.8 TC6.1 | R_18.2 LM35_PORT.3 | 72.47,9.6 72.55,9.53 85.72,9.53 92.71,16.51 109.86,16.51 R_1.1 107.31,19.05 | v26.67,10.16 18.11,10.16 U$4.GND | C_8.2 107.31,19.05 | v139.7,83.82 135.89,83.82 134.62,82.55 v133.35,82.55 | C_15.2 134.62,41.91 137.16,44.45 137.16,52.07 138.43,53.34 140.34,53.34 C_14.2
  Bottom 0.305: R_5.1 R_4.1 87,47.31 v88.42,48.74 | R_1.1 117.47,22.86 117.47,24.13 | 117.47,24.13 C_2.- 129.54,24.13 129.54,25.24 129.62,25.32 | 117.47,24.13 R_14.1 | C_7.2 132.08,113.03 AD_LATCH.1 130.97,111.76 132.72,110.01 132.72,87.15 132.64,87.07 | v132.72,22.23 137.16,22.23 U$2.GND | 131.52,41.35 129.54,39.37 129.54,25.4 129.62,25.32 | 131.52,41.35 C_15.2 | C_3.2 129.62,25.32 | 131.44,41.43 131.52,41.35 | 132.72,87 132.64,87.07 | 132.64,87.07 AD_LATCH.10 132.08,87.63 132.08,83.82 v133.35,82.55 | 16.67,106.52 16.67,107 ADC-1.26 | ADC-1.4 23.97,106.52 23.97,107 ADC-1.3 23.97,107.16 23.73,107.39 | 23.73,107.39 23.97,107.63 ADC-1.2 | 23.73,107.39 23.57,107.24 | 23.57,107.24 22.78,106.44 | ADC-1.14 23.97,99.85 21.59,99.85 | 19.68,106.52 22.7,106.52 22.78,106.44 | 19.68,106.52 16.67,106.52 | 16.67,106.52 ADC-1.25 | 8255.7 89.53,114.3 89.53,117.32 LCD1.16 | C_20.2 41.91,106.84 41.59,106.52 U1.2 | U$1.P$1 51.28,123.98 51.28,117.47 LCD1.1 51.28,117.32 51.28,114.78 C_21.2 46.99,110.49 C_17.2 | C_16.2 21.59,88.27 21.59,99.85 | 8085.20 67.31,64.77 C_6.2 DECODER.5 | SL2.10 DECODER.8 73.66,73.66 73.66,85.09 74.93,86.36 C_4.2 | RE_SWI.3 36.04,4.13 34.13,6.03 34.13,14.76 R_3.1 31.11,14.61 v26.67,10.16 | 54.05,8.97 53.34,8.26 53.34,6.99 C_12.- | 54.05,8.97 C_11.2 | 54.05,8.97 58.9,4.13 SID_SWI.3 | 16.51,16.03 13.65,16.03 | 13.65,16.03 13.34,16.03 HR4.1 13.65,16.03 | U$3.2 16.51,16.03 | 13.65,16.03 13.65,19.68 12.7,19.68 HR5.1 12.7,19.84 11.43,21.11 11.43,23.02 | R9.2 11.43,23.02 | HRCOM.1 20.32,25.24 19.84,24.77 HR3.1 19.68,24.77 19.68,22.7 16.83,22.7 16.51,23.02 11.43,23.02 | HC5.2 22.86,22.38 23.5,23.02 23.5,24.11 HC1.2 23.51,24.78 24.13,25.4 C_18.2
  Bottom 0.305: R_18.2 15.24,48.26 15.24,49.53 TC6.1 16.51,56.04 26.51,66.04 IC3.7 26.04,66.67 22.86,66.67 22.23,67.31 C_5.2 24.13,78.11 24.13,83.82 25.4,85.09 SL5.1 | 23.57,107.24 25.32,107.24 28.57,110.49 SL5.11 33.02,110.49 31.75,109.22 31.75,106.68 33.02,105.41 | ADC-1.6 28.28,105.11 28.57,105.41 33.02,105.41 | 33.02,105.41 SL5.9 | ADC-1.21 18.09,103.81 19.05,104.78 19.05,105.89 19.68,106.52 | 16.51,16.03 16.51,14.61 17.78,13.34 23.5,13.34 v26.67,10.16 | IC1.7 22.23,45.72 TC7.1 | 25.4,11.43 v26.67,10.16 | 22.78,106.44 22.78,105.97 20.95,104.14 20.95,100.49 21.59,99.85
  Bottom 0.406: C_14.2 140.97,55.88 143.51,58.42 143.51,81.28 142.24,81.28 v139.7,83.82
HLDA
  Top 0.305: SL4.8 8085.38
HOLD
  Top 0.305: R_3.2 SL4.9 8085.39
INTA
  Top 0.305: SL2.1 8085.11
INTR
  Top 0.305: 8085.10 SL1.10 R_4.2
IO/M*  (via drill 0.64)
  Top 0.305: SL4.4 8085.34 | v37.62,46.99 33.18,46.99 28.1,52.07 25.4,52.07 24.13,53.34 24.13,54.61 25.4,55.88 IC1.3
  Bottom 0.305: v37.62,46.99 41.27,43.34 41.27,32.38 SL4.4 | DECODER.3 60.33,74.3 56.52,74.3 54.61,72.39 54.61,71.12 55.88,69.85 55.88,64.77 55.24,64.14 55.24,34.92 8085.34
IOR*  (via drill 0.64)
  Top 0.305: IC2.4 12.7,76.83 21.27,76.83 21.91,77.47 v58.1,77.47
  Bottom 0.305: IC2.4 6.99,74.93 6.99,78.74 IC2.1 | DECODER.10 73.03,80.64 73.03,81.92 | 73.03,81.92 73.03,91.76 73.66,92.39 73.66,94.77 73.03,95.41 73.03,104.78 74.93,106.68 95.89,106.68 97.16,107.95 8255.5 | v58.1,77.47 63.5,77.47 63.5,81.12 64.29,81.92 73.03,81.92
IOW*  (via drill 0.64)
  Top 0.305: v76.2,83.66 77.79,85.25 v95.73,85.25
  Bottom 0.305: DECODER.9 76.2,81.28 v76.2,83.66 | v95.73,85.25 97.16,86.68 8255.36
MEMR*  (via drill 0.64)
  Top 0.305: DECODER.14 65.72,76.52 v87.31,76.52 | v90.33,64.45 91.12,63.66 109.7,63.66 113.03,60.33 ROM1.22
  Bottom 0.305: v87.31,76.52 90.33,73.5 v90.33,64.45 | RAM-62256P.22 111.76,35.56 111.76,58.26 113.03,59.53 ROM1.22
MEMW*  (via drill 0.64)
  Top 0.305: v71.12,36.99 71.28,36.83 123.19,36.83 RAM-62256P.27
  Bottom 0.305: DECODER.13 71.12,73.66 v71.12,36.99
N$1
  Bottom 0.305: SOD_LED.K 81.28,6.99 SODR_11.2
N$2
  Bottom 0.305: POW_LED.K 117.47,15.88 R_14.2
N$3  (via drill 0.6)
  Top 0.305: IC1.6 27.94,48.26 34.29,41.91 34.29,22.86 v36.83,20.32
  Bottom 0.305: v36.83,20.32 36.83,14.61 40.01,11.43 40.01,1.91 40.64,1.27 73.03,1.27 SOD_LED.A
N$4  (via drill 0.64)
  Top 0.305: 16.11,11.35 14.45,9.68 14.45,5.71 25.88,5.71 29.05,8.89 LED1.C | 16.11,11.35 16.35,11.59 16.67,11.59 U$4.VCC | v18.41,19.05 14.13,14.76 14.13,11.43 16.03,11.43 16.11,11.35
  Bottom 0.305: v18.41,19.05 18.41,19.37 17.46,20.32 U$3.5
N$5  (via drill 0.64)
  Top 0.305: v24.13,19.21 27.3,22.38 v27.46,22.38
  Bottom 0.305: HC3.1 28.57,15.24 28.57,21.27 27.62,22.23 27.46,22.23 | 27.46,22.23 26.04,22.23 HC2.2 | v24.13,19.21 24.13,19.53 22.86,20.8 HC5.1 | 27.46,22.23 v27.46,22.38
N$8
  Bottom 0.305: 21.59,14.61 18.41,14.61 H_R1.1 | HC3.2 22.54,15.24 21.91,14.61 21.59,14.61 | 21.59,14.61 HC4.1
N$9  (via drill 0.64)
  Top 0.305: v14.76,21.91 16.67,23.81 v17.3,23.81
  Bottom 0.305: HC4.2 21.59,16.03 23.97,16.03 23.97,17.3 25.72,19.05 HR2.1 25.88,19.05 24.77,20.16 24.77,23.97 25.4,24.61 25.4,28.26 26.04,28.89 26.04,34.92 25.4,35.56 23.02,35.56 18.89,31.43 18.89,25.24 18.41,24.77 HR3.2 18.26,24.77 v17.3,23.81 | v14.76,21.91 14.76,18.57 15.56,17.78 U$3.3
N$10  (via drill 0.64)
  Top 0.305: v21.75,17.62 v18.73,20.64
  Bottom 0.305: H_R1.2 18.41,16.03 20.64,16.03 20.64,16.51 v21.75,17.62 22.86,18.73 22.86,19.05 HR6.1 | v18.73,20.64 18.73,21.59 16.83,21.59 15.72,20.48 U$3.4
N$11  (via drill 0.64)
  Top 0.305: v15.24,12.54 16.83,12.54 17.78,11.59 U$4.OUT 17.94,11.59 18.26,11.59 v27.46,20.8
  Bottom 0.305: v15.24,12.54 13.34,14.45 HR4.2 | v27.46,20.8 26.04,20.8 HC2.1
N$12
  Bottom 0.305: FINGERLED.GND 14.29,8.41 12.38,10.32 12.38,17.94 12.7,18.26 HR5.2
N$13  (via drill 0.6)
  Top 0.305: v2.54,120.65 19.05,120.65 v20.32,119.38
  Bottom 0.305: 24.13,108.43 ADC-1.1 21.18,108.36 20.32,109.22 v20.32,119.38 | TEMP_SENSOR.1 6.99,46.99 R_19.2 12.7,50.8 R_18.1 12.7,57.15 11.43,58.42 2.54,58.42 1.27,59.69 1.27,119.38 v2.54,120.65
N$14
  Top 0.305: LM35_PORT.2 R_20.1 TC6.2
N$16
  Bottom 0.305: U$1.P$3 55.88,117.95 56.36,117.47 LCD1.3
N$17
  Top 0.305: R_20.2 7.62,54.61 R_19.1
N$18  (via drill 2.8)
  other vias: 140.34,126.36
N$19
  Top 0.305: LM358.2 HRCOM.2 R9.3
N$20
  Top 0.305: PULSE.1 LM358.1
  Bottom 0.305: IC3.3 28.57,74.3 28.57,43.81 LM358.1
N$21  (via drill 2.8)
  other vias: 4.45,4.45
N$22  (via drill 2.8)
  other vias: 140.34,4.45
N$23  (via drill 2.8)
  other vias: 4.45,126.36
N$29
  Bottom 0.305: R_17.1 87,117.47 LCD1.15
N$31
  Bottom 0.305: U$2.VBUS 137.16,26.04 134.62,26.04 129.54,20.95 129.54,18.24 SLIDE.1 127,15.72
N$32
  Top 0.305: R_1.2 111.92,9.68 127,9.68 SLIDE.3
OUT
  Top 0.305: LM358.3 3.81,34.29 2.54,33.02 HEART_PULSE.1
  Bottom 0.305: U$3.1 17.46,17.62 17.46,17.14 19.53,17.14 21.43,19.05 HR6.2 21.27,19.05 21.27,27.15 21.59,27.46 21.59,31.75 LM358.3
RD*
  Top 0.305: SL4.2 8085.32
  Bottom 0.305: DECODER.2 57.78,70.48 57.78,35.08 51.91,29.21 49.53,29.21 48.9,29.84 48.9,33.66 8085.32
READY
  Top 0.305: R_2.2 SL4.5 8085.35
RES_IN
  Top 0.305: SL4.6 8085.36 | C_12.+ 48.26,8.26 C_13.1 47.62,7.78 46.83,8.57 42.7,8.57 RE_SWI.2 42.55,8.57 36.2,8.57 RE_SWI.1
  Bottom 0.305: RE_SWI.2 42.7,8.73 42.7,10.95 R_10.2 45.09,12.06 46.99,13.97 46.99,22.86 44.45,25.4 SL4.6
RES_OUT  (via drill 0.64)
  Top 0.305: SL1.3 8085.3 | v94.61,81.76 87.79,74.93 v87.31,74.93
  Bottom 0.305: v94.61,81.76 8255.35 | v87.31,74.93 82.07,69.69 82.07,42.86 76.04,36.83 73.03,36.83 73.03,22.23 SL1.3
RS
  Top 0.305: 8255.14 72.71,113.35 72.39,113.67 62.71,113.67 59.05,117.32 LCD1.4
RST5_5
  Top 0.305: 8085.9 SL1.9 R_5.2
RST6.5  (via drill 0.64)
  Top 0.305: IC3.5 27.94,69.85 v50.16,69.85 | R_6.2 SL1.8 8085.8
  Bottom 0.305: v50.16,69.85 55.24,74.93 62.23,74.93 63.5,73.66 63.5,64.77 64.14,64.14 64.14,34.92 8085.8
RST7.5
  Top 0.305: CHANGE.4 90.17,11.11 96.52,11.11 CHANGE.3 | 8085.7 SL1.7 R_7.2
  Bottom 0.305: R_7.2 81.92,27.94 81.92,19.37 90.01,11.27 CHANGE.4
S0
  Top 0.305: SL3.9 8085.29
S1
  Top 0.305: SL4.3 8085.33
SID
  Top 0.305: C_9.1 69.06,8.73 65.56,8.73 SID_SWI.2 65.41,8.57 59.05,8.57 SID_SWI.1 | 8085.5 SL1.5 R_9.2
  Bottom 0.305: C_9.1 67.94,11.43 67.94,23.5 8085.5
SID1
  Bottom 0.305: R_15.2 94.61,13.34 94.61,8.57 94.69,8.49 | 94.69,8.49 96.52,6.67 CHANGE.1 | CHANGE.2 90.17,6.67 94.61,6.67 94.61,8.41 94.69,8.49
SOD  (via drill 0.6, 0.64)
  Top 0.305: v58.9,68.42 57.78,68.42 53.82,72.39 43.18,72.39 v41.91,73.66 | 8085.4 SL1.4 | v38.1,58.42 35.56,59.69 24.13,59.69 22.86,59.05 22.86,51.44 24.13,50.8 IC1.5
  Bottom 0.305: v58.9,68.42 63.5,63.82 63.5,25.4 8085.4 | IC3.1 28.57,83.19 40.64,83.19 41.91,81.92 v41.91,73.66 40.64,73.66 40.01,73.03 40.01,60.33 v38.1,58.42
TRAP
  Top 0.305: 8085.6 SL1.6 R_8.2
VCC  (via drill 0.6, 0.64)
  Top 0.305: AD_LATCH.20 C_7.1 130.02,120.17 97.63,120.17 R_17.2 94.61,123.03 93.5,121.92 U$1.P$2 40.64,121.92 R_16.1 31.75,123.19 29.21,120.65 | DECODER.6 67.94,74.3 62.87,74.3 DECODER.16 56.04,81.12 34.29,81.12 IC3.14 31.75,78.74 IC3.2 C_5.1 18.41,78.74 IC2.14 | C_21.1 51.44,112.39 46.35,112.39 C_17.1 38.1,120.65 29.21,120.65 | SL6.1 SL6.2 24.13,115.57 29.21,120.65 | ROM1.28 128.27,60.01 125.73,60.01 ROM1.27 125.73,63.5 129.54,67.31 v132.72,67.31 | 128.27,26.67 C_2.+ 119.38,22.86 119.38,15.24 123.19,11.43 | 128.27,26.67 C_3.1 | 52.78,13.26 53.98,12.06 C_11.1 | 52.78,13.26 8085.40 SL4.10 40.01,12.06 R_10.1 33.81,12.06 33.42,11.67 | 33.42,11.67 30.64,8.89 LED1.A | 33.42,11.67 v27.46,17.62 27.78,17.62 31.75,21.59 31.75,27.3 R_2.1 C_18.1 25.4,26.67 22.86,26.67 v22.7,26.19 15.88,26.19 13.97,28.1 7.78,28.1 R9.1 | LM35_PORT.1 3.81,52.07 18.41,52.07 TC7.2 23.5,46.99 27.78,46.99 31.75,43.02 LM358.8 | C_1.1 IC1.14 | R_15.1 87,13.34 52.86,13.34 52.78,13.26 | v17.78,95.89 v20.32,95.89 | v20.32,105.41 20.32,107.31 v19.68,107.95 | POW_LED.A 123.19,11.43 | 123.19,11.43 125.73,11.43 SLIDE.2 | 128.27,26.67 125.73,29.21 125.73,31.75 RAM-62256P.28 128.27,38.1 129.54,39.37 C_15.1 139.7,39.37 140.97,40.64 v140.97,45.72 143.51,48.26 C_14.1
  Bottom 0.305: 8255.26 72.39,95.89 C_4.1 69.85,92.71 DECODER.16 | DECODER.6 C_6.1 | C_21.1 52.7,116.2 53.82,117.32 LCD1.2 | ADC-1.28 16.67,108.27 16.67,107.79 ADC-1.27 16.9,107.95 v19.68,107.95 | 16.51,108.43 ADC-1.28 | IC2.14 14.61,82.55 C_16.1 14.61,87 16.51,88.9 16.51,95.25 v17.78,95.89 | R_15.1 88.9,23.5 R_9.1 95.25,25.4 109.22,11.43 POW_LED.A | OUT1.1 3.89,12.62 | FINGERLED.V+ 19.68,8.26 19.68,7.3 18.1,5.71 10.79,5.71 3.89,12.62 | R9.1 3.97,24.29 3.97,12.7 3.89,12.62 | v27.46,17.62 27.46,19.05 HR2.2 | C_18.1 26.67,34.29 LM358.8 31.75,58.42 32.46,59.13 | 32.46,59.13 IC1.14 | 32.46,59.13 32.38,59.21 32.38,73.03 IC3.2 25.4,78.74 24.77,78.11 24.77,74.3 25.4,73.66 IC3.4 | v20.32,95.89 v20.32,105.41 | SL6.2 13.97,115.57 16.51,113.03 16.51,108.52 ADC-1.28 | v22.7,26.19 22.7,25.88 22.23,25.4 22.23,24.14 HC1.1 | v140.97,45.72 137.16,49.53 135.89,49.53 132.72,52.7 v132.72,67.31
VREF  (via drill 0.6)
  Top 0.305: v27.3,106.68 30.48,106.68 31.75,107.95 SL5.10
  Bottom 0.305: ADC-1.5 26.39,105.77 v27.3,106.68
  Bottom 0.406: 39.37,107.95 C_20.1 R_16.2 | 39.37,107.95 39.37,106.84 39.69,106.52 U1.1 | 39.37,107.95 SL5.10
WR*  (via drill 0.64)
  Top 0.305: SL4.1 8085.31 v56.67,43.97
  Bottom 0.305: DECODER.1 56.67,71.91 v56.67,43.97
X1
  Top 0.305: 8085.1 SL1.1 80.01,15.24 Q1.2
X2
  Top 0.305: C_8.1 81.28,21.59 Q1.1 77.47,17.78 SL1.2 8085.2

## Text on the board
_tNames: HEALTH KIT | AJAY CHOWDHARY (15EC14) | ADHIRAJ CHANDEL(12EC14) | PLACE FINGER HERE